# Altium PCB ConnectorBreakout.PcbDoc
Units mil, origin at the board's own origin, x right, y up, seen from the top; angles counter-clockwise.
Board outline 465 x 900 mil, 2 copper layers (Top Layer, Bottom Layer); 2 components, 14 nets, 28 pads, 0 vias.
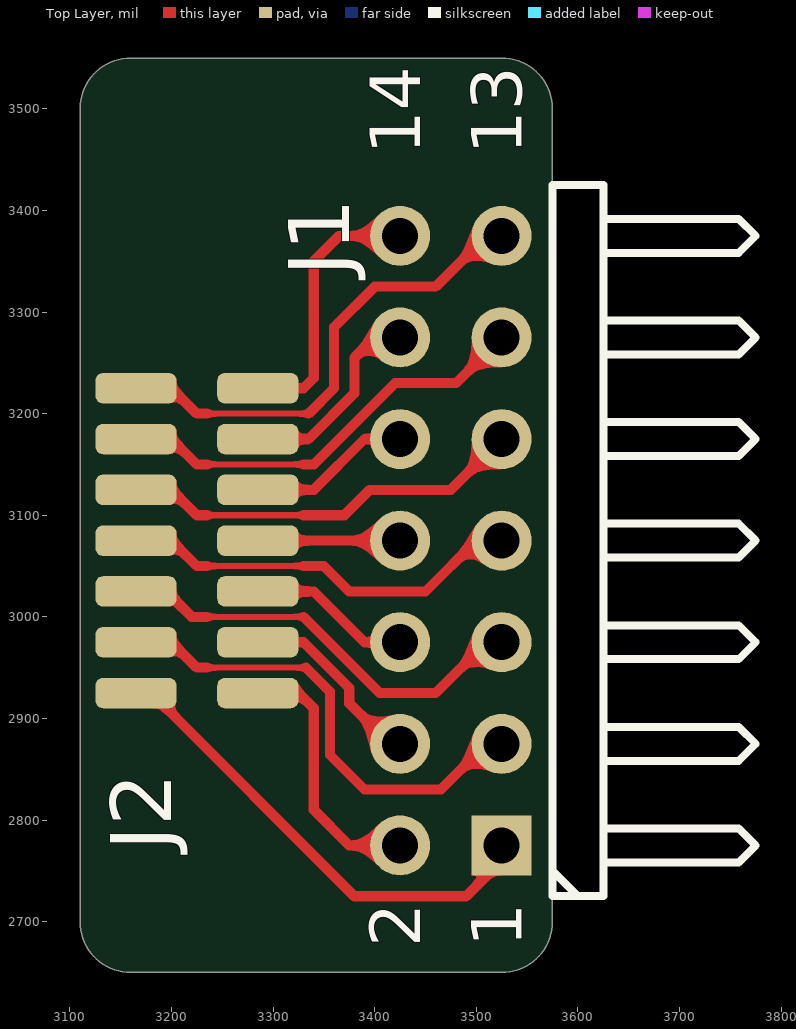
[diagram p0: Top Layer view]
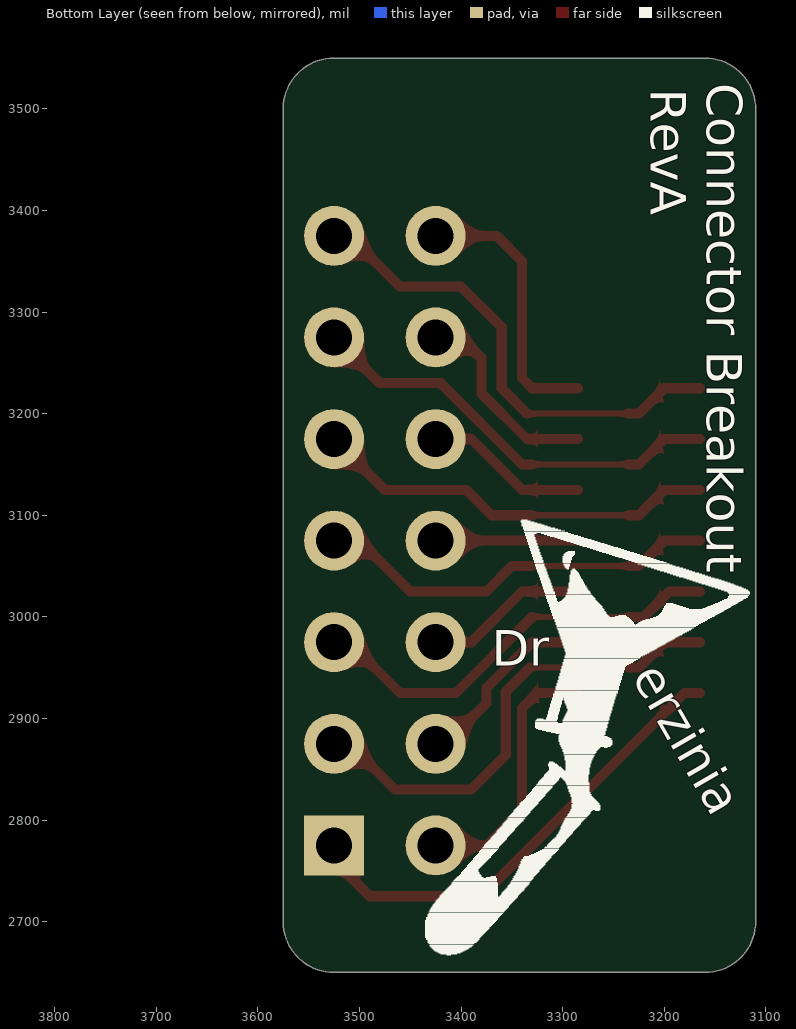
[diagram p1: Bottom Layer view, seen from below]

## Layer stack, top to bottom
Top Solder: solder mask 0.4, Solder Resist, Dk 3.5
Top Layer: signal copper 1.4
Dielectric 1: dielectric 12.6, FR-4, Dk 4.8
Bottom Layer: signal copper 1.4
Bottom Solder: solder mask 0.4, Solder Resist, Dk 3.5

## Board outline
3110,2700 3110,3500 cw(c3160,3500) 3160,3550 3525,3550 cw(c3525,3500) 3575,3500 3575,2700 cw(c3525,2700) 3525,2650 3160,2650 cw(c3160,2700)

## Design rules (kind name [scope] priority, off if disabled: settings)
Clearance [All] p1: gap=6 ignorepadtopadclearanceinfootprint=FALSE except(0: Arc-Hole Track-Hole SMDPad-Hole THPad-Hole Via-Hole Fill-Hole Poly-Hole Region-Hole Text-Hole)
PolygonConnect [All] p1: connectstyle=Relief reliefconductorwidth=10 reliefentries=4 polygonreliefangle="90 Angle" airgapwidth=10
RoutingVias [All] p1: holewidth=28 width=50 viastyle="Through Hole" minholewidth=28 minwidth=50 maxholewidth=28 maxwidth=50
SolderMaskExpansion [All] p1: expansion=4
Width [All] p1: maxlimit=10 minlimit=6 preferedwidth=10 minimp=50.000000 maximp=50.000000 favimp=50.000000
30 further rules are at their usual default settings.

## Classes and differential pairs
component class ConnectorBreakout: J2

## Components (designator, comment, footprint, x,y, rotation, side; value= is the part's Value field where it differs from the comment)
J1 "Header 7X2" HDR2X7H 3525,2775 r90 top
J2 "Header 7X2" CLP-107-02-L-DH-TR 3225,3075 r90 top

## Footprints (in the part's own frame and the unit in brackets; to place one, negate y for a bottom-side part, rotate by r counter-clockwise, add the part's x,y. Pads: shape width x height; smd on the part's side, far side on the other; paste and mask are expansions set on the pad)
CLP-107-02-L-DH-TR [mil]
  rrect50% 30x80 smd: 1(150,60) 2(150,-60) 3(100,60) 4(100,-60) 5(50,60) 6(50,-60) 7(0,60) 8(0,-60) 9(-50,60) 10(-50,-60) 11(-100,60) 12(-100,-60) 13(-150,60) 14(-150,-60)
  body extent -184,-90 184,90, height 136
HDR2X7H [mm] "Connector; Header; 7x2 Position; Right Angle"
  rect 1.5x1.5 hole 0.9: 1(0,0)
  round 1.5 hole 0.9: 2(0,2.54) 3(2.54,0) 4(2.54,2.54) 5(5.08,0) 6(5.08,2.54) 7(7.62,0) 8(7.62,2.54) 9(10.16,0) 10(10.16,2.54) 11(12.7,0) 12(12.7,2.54) 13(15.24,0) 14(15.24,2.54)
  silkscreen extent -1.27,-6.35 16.51,-1.27

## Part data
J1 J2: "Header, 7-Pin, Dual row", LatestRevisionDate=17-Jul-2002, LatestRevisionNote="Re-released for DXP Platform.", Publisher="Altium Limited", System=Connector

## Nets (pads, with @x,y where several pads share a name; then routed paths per layer and width w, separated by ;. In a path a pad name is that pad's centre, name@x,y a point inside that pad or via, vN(x,y) a via of type N, cw(c..) or ccw(c..) an arc to the next point about the centre after c; other vN are vias at no path point)
NetJ1_1: J1.1 J2.13 | length 472.3
  Top Layer w10: J2.13 3180,2925 3380,2725 3490,2725 3525,2760 J1.1
NetJ1_2: J1.2 J2.14 | length 260.7
  Top Layer w10: J2.14 3325,2925 3340,2910 3340,2810 3375,2775 J1.2
NetJ1_3: J1.3 J2.11 | length 475.2
  Top Layer w6: 3235,2950 3332.37,2950
  Top Layer w10: J2.11 3200,2975 3225,2950 3235,2950 ; 3332.37,2950 3356,2926.37 3356,2864 3390,2830 3465,2830 3510,2875 J1.3
NetJ1_4: J1.4 J2.12 | length 190.2
  Top Layer w10: J2.12 3330,2975 3375,2930 3375,2915 3415,2875 J1.4
NetJ1_5: J1.5 J2.9 | length 422.1
  Top Layer w6: 3235,3000 3330,3000
  Top Layer w10: J2.9 3195,3025 3220,3000 3235,3000 ; 3330,3000 3405,2925 3460,2925 3510,2975 J1.5
NetJ1_6: J1.6 J2.10 | length 160.7
  Top Layer w10: J2.10 3340,3025 3390,2975 J1.6
NetJ1_7: J1.7 J2.7 | length 401.4
  Top Layer w6: 3235,3050 3330,3050
  Top Layer w10: J2.7 3200,3075 3225,3050 3235,3050 ; 3330,3050 3350,3050 3375,3025 3450,3025 3500,3075 J1.7
NetJ1_8: J1.8 J2.8 | length 140
  Top Layer w10: J2.8 J1.8
NetJ1_9: J1.9 J2.5 | length 401.4
  Top Layer w6: 3235,3100 3330,3100
  Top Layer w10: J2.5 3200,3125 3225,3100 3235,3100 ; 3330,3100 3370,3100 3395,3125 3475,3125 J1.9
NetJ1_10: J1.10 J2.6 | length 160.7
  Top Layer w10: J2.6 3340,3125 3390,3175 J1.10
NetJ1_11: J1.11 J2.3 | length 422.1
  Top Layer w6: 3235,3150 3330,3150
  Top Layer w10: J2.3 3200,3175 3225,3150 3235,3150 ; 3330,3150 3340,3150 3420,3230 3480,3230 J1.11
NetJ1_12: J1.12 J2.4 | length 201.9
  Top Layer w10: J2.4 3335,3175 3380,3220 3380,3255 3400,3275 J1.12
NetJ1_13: J1.13 J2.1 | length 478
  Top Layer w6: 3235,3200 3335,3200
  Top Layer w10: J2.1 3200,3225 3225,3200 3235,3200 ; 3335,3200 3360,3225 3360,3285 3400,3325 3460,3325 3510,3375 J1.13
NetJ1_14: J1.14 J2.2 | length 269.5
  Top Layer w10: J2.2 3330,3225 3340,3235 3340,3350 3365,3375 J1.14

## Silkscreen, mask and mechanical layers (free items; w line width, h text height)
Bottom Overlay:
  drawing of 735 lines, arcs and shapes, not listed
  text "Connector Breakout" at 3170,3525 h60 r90
  text "RevA" at 3225,3520 h60 r90
  text "Dr" at 3370,2940 h60
  text "erzinia" at 3243,2935 h60 r60
Mechanical 2:
  lines w10: 3175,2650 3515,2650 ; 3515,2650 3525,2650 ccw(c3525,2700) 3575,2700 3575,2710 3575,3485 3575,3500 ccw(c3525,3500) 3525,3550 3510,3550 3175,3550 3160,3550 ccw(c3160,3500) 3110,3500 3110,3485 3110,2715 3110,2700 ccw(c3160,2700) 3160,2650 3515,2650

## Text inside footprints (layer, text, board x,y; h text height)
J1: Top Overlay "14" at 3445,3455 h50 r90; Top Overlay "13" at 3545,3455 h50 r90; Top Overlay "1" at 3545,2675 h50 r90; Top Overlay "2" at 3445,2675 h50 r90